# Altium PCB CAN Logger 3e HP3651 PCB.PcbDoc (part 3 of 3)
Units mm, origin at the board's own origin, x right, y up, seen from the top; angles counter-clockwise.
Board outline 56.62 x 82.65 mm, 4 copper layers (Component Side, Signal Layer 2, Signal Layer 1, Solder Side), stack 0.844 mm thick; 116 components, 130 nets, 582 pads, 374 vias.
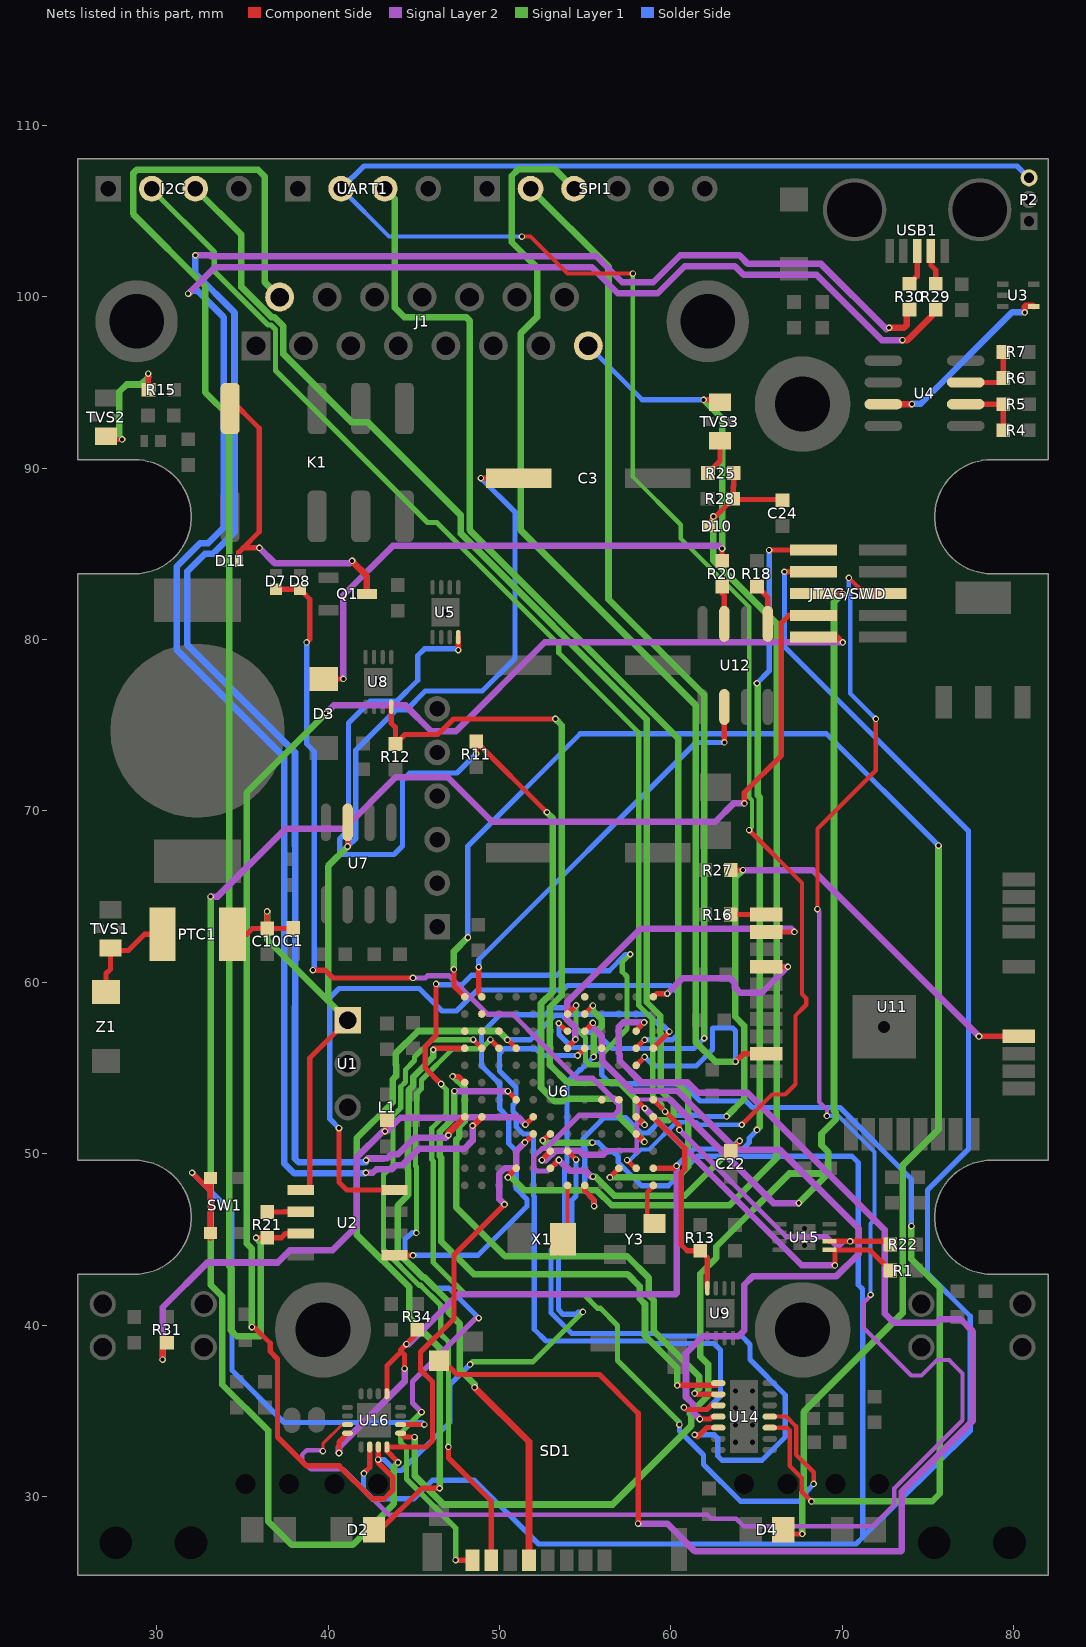
[diagram p5: the nets of this part, all layers, seen from the top]

## Via types
v1: diameter 0.381, hole 0.229, Component Side to Solder Side, 292 vias
v2: diameter 0.508, hole 0.254, Component Side to Solder Side, 66 vias
v3: diameter 0.508, hole 0.33, Component Side to Solder Side, 12 vias
v4: diameter 1.27, hole 0.711, Component Side to Solder Side, 4 vias

## Nets (pads, with @x,y where several pads share a name; then routed paths per layer and width w, separated by ;. In a path a pad name is that pad's centre, name@x,y a point inside that pad or via, vN(x,y) a via of type N, cw(c..) or ccw(c..) an arc to the next point about the centre after c; other vN are vias at no path point) (continued)
NetD11_1: D11.1 K1.8 Q1.3 | length 20.2
  Component Side w0.305: K1.8@34.29,93.472 34.29,94.02 35.992,92.318 35.992,86.284 35.052,85.344 ; D11.1@34.798,84.582 34.798,85.09 35.052,85.344 ; v1(35.992,85.344) 35.052,85.344
  Component Side w0.381: v1(41.402,84.582) 41.402,84.568 42.273,83.697 Q1.3@42.273,82.654
  Signal Layer 2 w0.381: v1(35.992,85.344) 36.881,84.455 41.275,84.455 v1(41.402,84.582)
NetJTAG/SWD_5: JTAG/SWD.5 U16.3 | length 107.8
  Component Side w0.178: v1(39.7,32.645) 39.7,33.073 40.82,34.193 U16.3@41.134,34.193
  Component Side w0.254: v1(68.555,64.262) 68.555,68.954 71.958,72.358 v1(71.958,75.362) ; v1(70.383,83.591) 70.397,83.591 71.311,82.677 JTAG/SWD.5@72.366,82.677
  Signal Layer 2 w0.254: v1(39.7,32.645) 39.643,32.703 38.754,32.703 38.494,32.442 38.494,32.074 38.983,31.585 40.89,31.585 43.544,28.931 62.14,28.931 62.369,28.702 63.819,28.702 64.264,28.258 71.755,28.258 73.038,29.54 73.038,30.474 77.016,34.452 77.016,37.178 76.233,37.961 75.528,37.961 74.625,37.059 74.028,37.059 71.26,39.827 71.26,41.316 71.65,41.706 v1(71.65,41.77) ; v1(68.555,64.262) 68.664,64.152 68.664,53.019 69.11,52.574 v1(69.11,52.204)
  Solder Side w0.254: v1(69.11,52.204) 69.775,52.204 71.884,50.095 71.884,46.15 71.65,45.916 v1(71.65,41.77) ; v1(70.383,83.591) 70.383,82.95 70.472,82.861 70.472,76.848 v1(71.958,75.362)
NetPTC1_1: PTC1.1 TVS1.2 Z1.2 | length 6
  Component Side w0.305: Z1.2@27.051,59.436 27.051,60.503 27.305,60.757 27.305,61.849 28.346,61.849 29.299,62.801 PTC1.1@30.353,62.801
NetR4_2: R4.2 R5.1 U4.6 | length 3.7
  Component Side w0.305: U4.6@77.203,93.726 R5.1@79.399,93.726 79.399,92.951 79.387,92.939 R4.2@79.387,92.202
NetR6_1: R6.1 R7.1 U4.7 | length 3.8
  Component Side w0.305: U4.7@77.203,94.996 79.133,94.996 R6.1@79.387,95.25 R7.1@79.387,96.774
NetR15_1: R15.1 TVS2.2 | length 6.8
  Component Side w0.305: TVS2.2@27.051,91.694 27.076,91.669 v1(27.991,91.669) ; v1(29.513,95.504) 29.513,94.578 R15.1@29.527,94.564
  Signal Layer 1 w0.381: v1(27.991,91.669) 27.826,91.834 27.826,94.444 28.254,94.873 29.087,94.873 29.515,95.301
NetR16_1: R16.1 U11.10 | length 2.1
  Component Side w0.305: R16.1@63.488,63.952 U11.10@65.558,63.952
NetR18_2: R18.2 U12.1 | length 2.4
  Component Side w0.305: R18.2@65.024,83.083 65.659,82.448 U12.1@65.659,80.911
NetR20_2: R20.2 U12.3 | length 2.2
  Component Side w0.305: R20.2@62.992,83.083 62.992,82.672 63.119,82.545 U12.3@63.119,80.911
NetR21_1: R21.1 U2.6 | length 2
  Component Side w0.305: R21.1@36.449,46.597 37.414,46.597 37.426,46.609 U2.6@38.408,46.609
NetR25_1: R25.1 TVS3.2 | length 2
  Component Side w0.305: R25.1@62.168,89.709 62.865,90.406 TVS3.2@62.865,91.44
NetR29_2: R29.2 USB1.2 | length 2
  Component Side w0.305: USB1.2@75.171,102.667 75.171,101.83 75.452,101.549 R29.2@75.452,100.751
NetR30_2: R30.2 USB1.3 | length 2.1
  Component Side w0.305: R30.2@73.928,100.751 74.371,101.194 USB1.3@74.371,102.667
NetSD1_5: SD1.5 U6.D1 | length 35.8
  Component Side w0.305: v1(46.139,56.065) 46.16,56.065 46.244,56.149 U6.D1@47.975,56.149
  Component Side w0.381: v1(48.55,36.364) 51.726,33.188 SD1.5@51.726,26.284
  Signal Layer 1 w0.381: v1(46.139,56.065) 46.139,55.649 44.983,54.494 44.983,53.981 44.712,53.709 44.712,52.134 44.64,52.063 44.64,49.085 44.688,49.038 44.688,47.592 44.069,46.974 44.069,44.24 45.51,42.798 45.6,42.798 47.041,41.357 47.041,40.724 47.676,40.089 47.676,37.421 48.55,36.548 v1(48.55,36.364)
NetSD1_7: SD1.7 U6.D2 | length 37.3
  Component Side w0.305: v1(47.028,32.893) 47.028,32.239 49.526,29.741 SD1.7@49.526,26.284 ; v1(48.475,56.649) U6.D2@48.975,56.149
  Signal Layer 1 w0.305: v1(47.028,32.893) 47.028,39.027 46.571,39.484 46.571,41.162 45.405,42.328 45.316,42.328 43.243,44.401 43.243,48.785 43.787,49.329 43.787,52.211 44.242,52.665 44.242,53.904 44.514,54.176 44.514,54.896 45.048,55.43 45.048,55.638 46.059,56.649 v1(48.475,56.649)
NetSD1_8: SD1.8 U6.D3 | length 41.4
  Component Side w0.305: v1(47.447,26.289) 47.513,26.289 47.518,26.284 SD1.8@48.426,26.284 ; v1(49.475,56.649) U6.D3@49.975,56.149
  Signal Layer 2 w0.305: v1(45.453,34.925) 44.931,35.447 44.931,36.498 44.934,36.502 44.934,36.705 48.638,40.409 v1(48.793,40.409) v1@48.808,40.423
  Signal Layer 1 w0.305: v1(45.161,45.375) 45.158,45.379 45.158,49.233 45.11,49.28 45.11,51.868 45.182,51.939 45.182,53.515 45.453,53.786 45.453,54.299 47.275,56.121 48.947,56.121 v1(49.475,56.649) ; v1(45.453,34.925) 44.242,33.714 44.242,33.163 44.577,32.828 44.577,31.027 47.447,28.157 v1(47.447,26.289)
  Solder Side w0.305: 44.894,45.39 44.69,45.187 44.667,45.187 44.488,45.008 44.488,43.874 46.214,42.149 47.053,42.149 v1(48.793,40.409) ; 44.894,45.39 45.147,45.39 v1(45.161,45.375)
NetU3_4: U3.4 U4.3 | length 11.3
  Component Side w0.381: U4.3@72.403,93.726 v1(74.066,93.726) ; v1(80.645,99.085) 80.645,99.411 80.698,99.464 81.126,99.464 U3.4@81.164,99.426
  Solder Side w0.381: v1(74.066,93.726) 74.092,93.751 74.574,93.751 79.908,99.085 v1(80.645,99.085)
NetU6_A8: U6.A8
NetU6_B2: U6.B2
NetU6_B7: U6.B7 U14.4 | length 77.8
  Component Side w0.254: U14.4@65.77,34.663 66.735,34.663 67.31,34.088 67.31,32.434 68.333,31.41 v1(68.333,30.734)
  Component Side w0.305: v1(46.304,59.906) 46.304,56.895 45.669,56.26 45.669,54.996 v1(46.601,54.064) ; U6.B7@53.975,58.149 v1(54.475,58.649)
  Signal Layer 1 w0.305: v1(46.601,54.064) 46.601,54.043 46.901,53.743 46.901,52.33 46.05,51.479 46.05,49.669 46.139,49.58 46.139,43.651 47.986,41.804 54.898,41.804 55.723,40.979 55.889,40.979 56.89,39.978 56.89,37.939 60.503,34.327 v1(60.503,34.188) ; v1(54.475,58.649) 54.475,57.33 55.029,56.776 55.029,55.406 55.254,55.181 55.778,55.181 55.994,55.398 55.994,55.821 57.442,57.268 57.442,60.335 57.164,60.613 57.164,61.166 v1(57.634,61.636)
  Solder Side w0.305: v1(46.304,59.906) 46.355,59.855 47.809,59.855 48.367,60.413 53.353,60.413 53.608,60.668 56.408,60.668 57.362,61.621 57.619,61.621 v1(57.634,61.636) ; v1(60.503,34.188) 60.503,33.829 61.912,32.419 61.912,31.862 64.057,29.718 67.462,29.718 67.888,30.143 67.888,30.268 68.333,30.713 v1(68.333,30.734)
NetU6_C1: U6.C1
NetU6_C2: U6.C2
NetU6_C3: U6.C3
NetU6_C7: U6.C7 U14.3 | length 58.8
  Component Side w0.254: U14.3@65.77,34.013 66.78,34.013 66.929,33.864 66.929,31.792 67.64,31.081 67.64,30.277 v1(68.199,29.718)
  Component Side w0.305: v1@53.461,57.607 U6.C7@53.947,57.121 ; U6.C7@53.947,57.135 U6.C7@53.947,57.121 ; U6.C7@53.975,57.149 U6.C7@53.947,57.121
  Signal Layer 1 w0.381: v1(68.199,29.718) 75.248,29.718 75.692,30.162 75.692,42.189 74.028,43.853 v1(74.028,45.771)
  Solder Side w0.305: v1(53.46,57.607) 53.475,57.593 53.475,56.96 54.238,56.197 55.617,56.197 55.969,55.846 55.969,54.597 56.49,54.077 60.706,54.077 61.709,53.073 64.376,53.073 64.757,52.692 69.861,52.692 74.028,48.525 v1(74.028,45.771)
NetU6_D7: U6.D7 U11.11 | length 19.8
  Component Side w0.305: U6.D7@53.975,56.149 53.975,56.188 54.418,56.631 54.418,56.653 v1(54.432,56.667) ; U11.11@65.558,62.936 67.202,62.936 v1(67.204,62.937)
  Signal Layer 2 w0.381: v1(54.432,56.667) 54.432,57.353 53.967,57.819 53.967,58.859 58.227,63.119 67.022,63.119 v1(67.204,62.937)
NetU6_D9: U6.D9
NetU6_G9: U6.G9
NetU6_G10: U6.G10
nINT0: U6.F1 U14.9 | length 31.5
  Component Side w0.305: v1(47.269,54.508) 47.616,54.508 U6.F1@47.975,54.149 ; v1(61.392,36.017) 61.446,35.963 U14.9@62.77,35.963
  Signal Layer 1 w0.381: v1(47.269,54.508) 47.327,54.508 47.981,53.855 47.981,51.902 47.65,51.571 47.65,50.977 47.473,50.8 47.473,46.874 50.328,44.018 57.455,44.018 58.699,42.774 58.699,41.746 59.001,41.444 59.001,39.652 61.671,36.982 61.671,36.297 v1(61.392,36.017)
nINT1: U6.G4 U14.8 | length 34.7
  Component Side w0.305: v1(50.495,53.645) U6.G4@50.956,53.184 ; v1(60.376,36.487) 61.586,36.487 ; 61.587,36.487 62.644,36.487 U14.8@62.77,36.613
  Signal Layer 2 w0.381: v1(47.371,53.645) v1(50.495,53.645)
  Signal Layer 1 w0.381: v1(47.371,53.645) 47.371,52.135 46.52,51.284 46.52,49.864 46.609,49.775 46.609,44.875 48.507,42.977 57.468,42.977 58.191,42.253 58.191,41.535 58.493,41.234 58.493,39.373 60.376,37.491 v1(60.376,36.487)
OSC16: U6.M12 Y3.3 | length 3.4
  Component Side w0.254: Y3.3@58.894,45.962 58.99,45.866 58.623,45.499 58.623,47.744 58.975,48.096 U6.M12@58.975,48.149
Program: SW1.1 SW1.2 U16.10 | length 32.3
  Component Side w0.305: v1(32.067,48.885) 33.147,47.806 33.147,46.66 ; SW1.1@33.147,45.06 33.147,46.66 ; SW1.2@33.147,48.26 33.147,46.66 ; U16.10@44.234,34.193 v1(45.618,34.193)
  Solder Side w0.305: v1(32.067,48.885) 34.392,46.561 34.392,37.363 37.44,34.315 45.496,34.315 v1(45.618,34.193)
PTA0: JTAG/SWD.4 U6.J5 U16.8 | length 123.8
  Component Side w0.305: v1(44.094,31.985) 43.434,32.645 U16.8@43.434,32.893 45.733,32.893 46.088,33.249 46.088,36.697 45.401,37.385 45.401,38.427 47.346,40.371 47.346,44.095 v1(50.295,47.045) ; v1(51.486,50.66) U6.J5@51.975,51.149 ; v1(64.287,70.434) 64.287,71.069 66.446,73.228 66.446,80.962 66.891,81.407 JTAG/SWD.4@68.326,81.407
  Signal Layer 2 w0.381: v1(33.147,64.999) 33.553,64.999 37.516,68.961 40.945,68.961 43.942,71.958 46.99,71.958 49.581,69.367 62.586,69.367 63.652,70.434 v1(64.287,70.434) ; v1(50.295,47.045) 49.987,47.353 49.987,48.826 50.31,49.149 50.952,49.149 50.978,49.174 50.978,50.152 v1(51.486,50.66)
  Signal Layer 1 w0.381: v1(33.147,64.999) 33.147,42.357 33.833,41.671 33.833,36.525 36.5,33.858 36.5,28.55 37.871,27.178 41.453,27.178 43.84,29.566 43.84,31.731 v1(44.094,31.985)
PTA1: JTAG/SWD.8 U6.J6 U16.6 | length 144.6
  Component Side w0.305: v1(42.088,31.344) 42.088,31.362 42.434,31.709 U16.6@42.434,32.893 ; v1(52.527,50.775) 52.542,50.789 52.576,50.789 52.936,51.149 U6.J6@52.975,51.149 ; v1(66.624,83.947) JTAG/SWD.8@68.326,83.947
  Signal Layer 1 w0.381: v1(52.527,50.775) 52.654,50.648 v1(55.423,50.648)
  Solder Side w0.305: 42.227,31.499 42.062,31.334 42.062,30.376 42.568,29.87 45.02,29.87 46.1,30.95 48.552,30.95 52.273,27.229 70.802,27.229 71.198,27.62 77.47,33.82 77.47,40.513 74.981,43.002 74.981,47.879 77.368,50.266 77.368,68.834 66.624,79.578 v1(66.624,83.947) ; v1(55.423,50.648) 55.766,50.648 56.312,50.102 56.659,50.102 56.934,49.826 56.934,49.48 58.281,48.133 59.852,48.133 61.567,49.847 70.56,49.847 70.933,49.475 70.933,42.356 71.18,42.109 71.18,41.194 71.196,41.177 71.196,27.622
PTA2: JTAG/SWD.6 U6.K6 U16.9 | length 102.2
  Component Side w0.305: U16.9@44.234,33.693 44.46,33.467 v1(45.047,33.467) ; v1(52.476,49.622) 52.476,49.65 U6.K6@52.975,50.149 ; JTAG/SWD.6@68.326,82.677 v1(70.028,82.677)
  Signal Layer 2 w0.254: 56.282,50.199 56.289,50.206 57.91,50.206 57.997,50.292 ; 58.004,50.082 58.005,50.205 58.036,53.087 57.975,53.149 59.944,53.162
  Signal Layer 2 w0.381: v1(52.476,49.622) 52.704,49.622 53.239,50.157 54.274,50.157 54.685,50.157 54.903,49.939 56.047,49.939 56.265,50.157 ; 59.944,53.162 65.989,47.117 v1(67.462,47.117)
  Signal Layer 1 w0.381: v1(45.047,33.467) 45.047,31.222 46.735,29.534 56.603,29.534 61.183,34.114 61.183,34.732 61.098,34.816 62.179,35.897 62.179,37.706 61.722,38.163 61.722,42.994 62.644,43.917 62.644,44.571 66.917,48.844 69.19,48.844 ; v1(67.462,47.117) 69.19,48.844 ; v1(70.028,82.677) 69.52,82.169 69.52,52.512 69.618,52.415 69.618,51.994 68.789,51.166 68.789,50.494 69.19,50.094 69.19,48.844
PTA3: JTAG/SWD.2 U6.K7 U16.7 | length 120
  Component Side w0.305: v1(35.56,39.878) 35.687,39.878 36.627,38.938 36.627,38.453 37.059,38.02 37.059,33.472 38.744,31.788 40.651,31.788 42.568,29.87 43.284,29.87 43.79,30.376 43.79,31.115 42.926,31.979 v1(42.926,32.156) ; v1@42.934,32.118 U16.7@42.934,32.893 ; U6.K7@53.975,50.149 v1(54.475,49.649) ; JTAG/SWD.2@68.326,80.137 69.723,80.137 v1(70.028,79.832)
  Signal Layer 2 w0.381: v1(39.878,75.692) 40.335,76.149 44.526,76.149 46.025,74.651 47.46,74.651 52.642,79.832 v1(70.028,79.832)
  Signal Layer 1 w0.305: v1(48.285,37.706) 48.438,37.859 51.956,37.859 v1(54.864,40.767)
  Signal Layer 1 w0.381: v1(35.56,39.878) 35.56,44.45 35.255,44.755 35.255,71.069 v1(39.878,75.692)
  Solder Side w0.305: v1(42.926,32.156) 43.258,32.156 43.9,31.515 44.289,31.515 47.11,34.336 47.11,36.531 v1(48.285,37.706) ; v1(54.475,49.649) 54.475,47.536 54.225,47.286 54.225,44.979 53.442,44.195 53.442,40.903 53.717,40.627 54.47,40.627 54.595,40.752 54.849,40.752 v1(54.864,40.767)
RAW: D3.1 J1.8 R20.1 TVS3.1 | length 48.2
  Component Side w0.305: D3.1@39.751,77.699 v1(40.894,77.699) ; v1(61.912,93.98) TVS3.1@62.865,93.98 ; R20.1@62.992,84.583 v1(62.992,85.3)
  Signal Layer 2 w0.381: v1(40.894,77.699) 40.894,82.575 43.79,85.471 62.821,85.471 v1(62.992,85.3)
  Signal Layer 1 w0.381: v1(61.912,93.98) 62.992,92.9 v1(62.992,85.3)
  Solder Side w0.305: J1.8@55.184,97.132 58.336,93.98 v1(61.912,93.98)
RAW_Measured: C24.2 D10.2 R25.2 R28.1 U6.L4 | length 64.2
  Component Side w0.305: v1@50.553,48.727 U6.L4@50.975,49.149 ; D10.2@62.218,86.614 62.406,86.97 62.914,87.478 ; v1(62.484,87.173) 62.609,87.173 62.914,87.478 ; R25.2@63.668,89.709 63.668,88.955 63.638,88.925 R28.1@63.638,88.202 ; C24.2@66.517,88.114 66.473,88.158 63.683,88.158 R28.1@63.638,88.202 ; 62.914,87.478 R28.1@63.638,88.202
  Signal Layer 1 w0.381: v1(50.495,48.616) 50.698,48.616 51.46,47.854 55.684,47.854 56.548,46.99 63.424,46.99 66.167,49.733 66.167,80.924 62.484,84.607 v1(62.484,87.173)
RAW_Sense: U6.A2 U12.6 | length 23.9
  Component Side w0.305: v1(48.793,60.883) 48.793,59.331 U6.A2@48.975,59.149 ; v1(63.119,73.99) U12.6@63.119,76.061
  Solder Side w0.305: v1(48.793,60.883) 48.793,61.316 61.468,73.99 v1(63.119,73.99)
RED: D2.1 SPI1.2 U6.D4 | length 108
  Component Side w0.305: D2.1@42.682,28.067 43.066,28.067 45.479,30.48 v1(46.507,30.48) ; v1(50.47,56.642) 50.482,56.642 U6.D4@50.975,56.149
  Signal Layer 1 w0.381: v1(46.507,30.48) 46.507,38.666 44.735,40.438 44.735,42.217 41.669,45.283 41.669,50.901 43.772,53.004 43.772,54.331 43.968,54.527 43.968,55.169 43.942,55.195 43.942,55.836 45.263,57.157 49.955,57.157 v1(50.47,56.642) ; SPI1.2@51.816,106.299 56.363,101.752 56.363,82.347 61.951,76.759 v1(61.951,56.733)
  Solder Side w0.305: v1(50.47,56.642) 51.812,56.642 53.247,58.077 53.655,58.077 54.152,57.58 54.185,57.58 54.682,57.082 55.63,57.082 56.578,56.134 61.352,56.134 v1(61.951,56.733)
RESET_B: JTAG/SWD.10 R34.2 U6.L12 U16.4 U16.13 | length 81.9
  Component Side w0.305: v1(40.64,32.537) 40.64,33.185 41.148,33.693 U16.4@41.134,33.693 ; U16.13@43.434,35.993 43.434,37.625 44.227,38.417 44.227,38.505 44.465,38.267 v1(44.465,37.465) ; 44.227,38.537 v1(44.577,38.887) 44.577,38.908 45.206,39.537 R34.2@45.206,39.726 ; U6.L12@58.975,49.149 60.204,49.149 v1(60.34,49.285) ; v1(65.735,85.217) JTAG/SWD.10@68.326,85.217
  Signal Layer 2 w0.381: v1(40.64,32.537) 40.64,32.88 44.465,36.705 v1(44.465,37.465) ; v1(44.577,38.887) 44.698,38.887 47.607,41.796 60.274,41.796 60.34,41.862 v1(60.34,49.285)
  Signal Layer 1 w0.381: v1(65.024,51.384) 65.176,51.537 65.176,70.802 65.077,70.902 65.077,77.392 v1(65.024,77.445)
  Solder Side w0.305: v1(60.34,49.285) 61.334,50.279 64.203,50.279 64.578,50.655 64.578,50.918 65.024,51.364 v1(65.024,51.384) ; v1(65.024,77.445) 65.735,78.156 v1(65.735,85.217)
RX1: P2.3 U6.L11 UART1.2 | length 124.4
  Component Side w0.254: v1(51.308,103.505) 51.816,103.505 53.975,101.346 v1(57.785,101.346) ; v1(57.455,49.624) 57.455,49.616 57.922,49.149 U6.L11@57.975,49.149 ; v1(64.135,51.689) 65.901,53.455 66.679,53.455 67.272,54.048 67.272,58.054 67.903,58.685 67.903,59.053 67.648,59.308 67.648,65.793 v1(64.569,68.872)
  Signal Layer 1 w0.254: v1(57.785,101.346) 57.785,89.484 60.579,86.69 60.579,85.884 64.569,81.894 64.569,70.781 64.732,70.618 64.732,69.035 v1(64.569,68.872)
  Solder Side w0.254: UART1.2@40.767,106.299 43.561,103.505 v1(51.308,103.505) ; v1(57.455,49.624) 57.625,49.624 58.242,50.241 58.731,50.241 60.319,51.829 61.491,51.829 61.631,51.689 v1(64.135,51.689)
  Solder Side w0.305: UART1.2@40.767,106.299 42.096,107.628 80.205,107.628 P2.3@80.899,106.934
"Safe 12V": C1.2 C3.1 C10.1 PTC1.2 U1.1 U2.5 U7.7 | length 66.1
  Component Side w0.305: PTC1.2@34.417,62.801 35.255,62.801 35.584,63.13 C10.1@36.449,63.13 ; v1(36.449,64.135) C10.1@36.449,63.13 ; C1.2@37.973,63.16 37.944,63.13 C10.1@36.449,63.13 ; U2.5@38.408,47.879 38.938,47.879 38.938,55.575 U1.1@41.148,57.785 ; v1(41.148,67.92) U7.7@41.148,69.329 ; v1(48.92,89.408) C3.1@51.134,89.408
  Signal Layer 1 w0.381: v1(36.449,64.135) 36.449,62.484 40.005,58.928 ; U1.1@41.148,57.785 40.005,58.928 ; v1(41.148,67.92) 40.005,66.777 40.005,58.928
  Solder Side w0.305: v1(41.148,67.92) 41.624,68.396 41.624,73.548 43.966,75.89 44.571,75.89 45.669,76.987 48.997,76.987 50.902,78.892 50.902,87.427 v1(48.92,89.408)
SCK: U6.D8 U14.10 | length 41.5
  Component Side w0.305: v1(54.559,55.728) 54.559,55.73 54.975,56.146 U6.D8@54.975,56.149 ; v1(60.766,35.203) 60.895,35.073 62.099,35.073 62.339,35.313 U14.10@62.77,35.313
  Solder Side w0.305: v1(54.559,55.728) 52.502,55.728 52.105,56.124 50.275,56.124 50,55.849 50,54.826 50.965,53.861 50.965,53.027 50.787,52.849 50.787,52.46 50.978,52.269 50.978,51.571 51.393,51.156 51.962,51.156 51.987,51.13 51.987,47.551 52.036,47.503 52.036,39.756 52.714,39.078 58.847,39.078 58.999,38.925 62.511,38.925 62.89,38.546 62.89,35.865 62.099,35.073 60.895,35.073 v1(60.766,35.203)
SCK1: SPI1.3 U6.E11 U11.18 | length 74.5
  Component Side w0.305: U6.E11@57.975,55.149 v1(58.474,55.648) ; v1(63.779,55.372) 64.231,55.824 U11.18@65.558,55.824
  Signal Layer 1 w0.381: SPI1.3@54.356,106.299 53.213,107.442 51.117,107.442 50.724,107.048 50.724,103.175 52.197,101.702 52.197,98.806 51.232,97.841 51.232,86.38 61.443,76.169 61.443,56.515 62.586,55.372 v1(63.779,55.372)
  Solder Side w0.305: v1(58.474,55.648) 59.004,55.118 61.481,55.118 62.433,56.07 62.433,57.302 62.459,57.328 63.614,57.328 63.779,57.163 v1(63.779,55.372)
SCL0: I2C.2 R22.2 U6.G12 U15.6 | length 85.5
  Component Side w0.305: U6.G12@58.975,53.149 60.488,51.636 60.488,51.399 v1(60.503,51.384) ; U15.6@69.247,44.886 v1(70.463,44.886) 72.627,44.886 R22.2@72.808,44.704
  Signal Layer 2 w0.305: v1(60.503,51.384) 66.731,45.156 69.106,45.156 69.609,44.653 69.861,44.653 70.079,44.871 70.448,44.871 v1(70.463,44.886)
  Signal Layer 1 w0.305: I2C.2@29.718,106.299 29.718,106.248 33.368,102.598 33.368,101.475 36.503,98.34 36.671,98.34 36.932,98.079 36.932,95.682 45.797,86.816 46.341,86.816 53.46,79.697 53.46,79.223 58.128,74.555 58.128,58.64 58.915,57.853 58.915,56.859 58.941,56.834 58.941,55.846 58.944,55.843 58.944,53.375 59.475,52.844 59.475,52.662 59.665,52.472 v1(59.665,52.451)
"SD Contact": SD1.DT U6.C11 | length 84.3
  Component Side w0.305: SD1.DT@46.486,37.914 46.913,37.486 47.158,37.486 47.522,37.122 55.832,37.122 58.094,34.861 v1(58.094,28.423) ; U6.C11@57.975,57.149 57.975,57.188 v1(58.445,57.658)
  Signal Layer 2 w0.381: v1(58.094,28.423) 59.792,28.423 61.417,26.797 73.406,26.797 73.482,26.873 73.482,30.29 77.622,34.43 77.622,39.624 76.911,40.335 75.692,40.335 75.489,40.132 73.025,40.132 72.485,40.672 72.485,45.549 64.491,53.543 61.595,53.543 60.96,54.178 60.579,54.178 58.26,54.178 57.023,55.416 57.023,55.811 56.972,55.862 56.972,57.404 57.226,57.658 v1(58.445,57.658)
SDA0: I2C.3 R1.2 U6.G11 U15.5 | length 88.6
  Component Side w0.305: U6.G11@57.975,53.149 57.977,53.149 58.475,52.651 v1(58.478,52.651) ; v1(69.571,43.485) 69.571,44.386 71.603,44.386 R1.2@72.808,43.18
  Signal Layer 2 w0.381: v1(58.478,52.651) 58.478,52.646 67.639,43.485 v1(69.571,43.485)
  Signal Layer 1 w0.381: I2C.3@32.258,106.299 34.95,103.607 34.95,100.557 36.697,98.81 36.866,98.81 37.402,98.274 37.402,96.65 41.393,92.659 42.331,92.659 47.752,87.238 47.752,86.178 58.598,75.332 58.598,58.835 59.385,58.047 59.385,57.054 59.411,57.028 59.411,56.914 59.414,56.911 59.414,53.674 60.173,52.915 60.173,52.241 59.875,51.943 59.183,51.943 v1@58.476,52.65
SDI: U6.C8 U14.11 | length 43
  Component Side w0.305: U6.C8@54.975,57.149 v1@55.451,57.626 ; v1(61.697,34.519) 62.289,34.519 62.433,34.663 U14.11@62.77,34.663
  Signal Layer 2 w0.381: v1(55.451,57.627) 55.451,57.382 55.956,56.877 55.956,55.913 56.007,55.862 56.007,55.39 57.727,53.67 60.369,53.67 63.798,50.241 66.345,50.241 70.971,45.615 70.971,44.166 69.641,42.837 64.77,42.837 64.287,42.355 64.287,39.688 63.944,39.345 61.874,39.345 60.884,38.354 60.884,35.803 61.308,35.379 61.308,34.907 v1(61.697,34.519)
SDO: U6.B8 U14.12 | length 47.4
  Component Side w0.305: U6.B8@54.975,58.149 54.975,58.16 v1(55.448,58.633) ; v1(61.392,33.604) 61.426,33.604 61.563,33.467 62.117,34.022 62.761,34.022 U14.12@62.77,34.013
  Signal Layer 1 w0.381: v1(55.448,58.633) 55.448,58.348 55.959,57.837 55.959,57.417 55.499,56.957 v1(55.499,55.651)
  Solder Side w0.305: v1(55.499,55.651) 54.742,54.895 54.692,54.895 53.95,54.153 53.95,49.45 53.793,49.294 53.793,45.157 53.01,44.374 53.01,40.724 54.224,39.51 59.103,39.51 59.256,39.357 64.135,39.357 64.618,38.875 64.618,37.984 66.675,35.927 66.675,33.467 65.326,32.118 62.981,32.118 62.735,32.364 62.735,33.404 62.672,33.467 62.535,33.604 v1(61.392,33.604)
"Silent 0": R11.1 U5.8 U6.J11 | length 62
  Component Side w0.305: v1(47.6,79.375) 47.601,79.376 U5.8@47.601,80.137 ; v1(48.641,73.33) R11.1@48.641,74.041 v1(52.764,69.918) ; U6.J11@57.975,51.149 57.993,51.149 v1(58.457,50.685)
  Signal Layer 1 w0.381: v1(52.764,69.918) 53.124,69.558 53.124,59.453 52.426,58.755 52.426,53.855 53.234,53.046 53.655,53.046 53.822,53.213 56.685,53.213 56.983,52.915 56.983,52.159 v1(58.457,50.685)
  Solder Side w0.305: v1(47.6,79.375) 47.523,79.451 45.631,79.451 45.237,79.057 45.237,77.622 44.018,76.403 42.469,76.403 41.192,75.127 41.192,68.866 40.678,68.351 40.678,67.488 40.716,67.45 43.853,67.45 44.348,67.945 44.348,71.793 44.767,72.212 47.523,72.212 v1(48.641,73.33)
"Silent 1": R12.1 U6.H11 U8.8 | length 41.1
  Component Side w0.305: U8.8@43.688,76.073 43.688,75.108 43.942,74.854 R12.1@43.942,73.902 44.487,74.447 46.406,74.447 47.32,75.362 v1(53.264,75.362) ; U6.H11@57.975,52.149 U6.H11@57.987,52.161 ; U6.H11@58.03,52.204 U6.H11@57.987,52.161 ; v1(58.467,51.681) U6.H11@57.987,52.161
  Signal Layer 1 w0.381: v1(53.264,75.362) 53.632,74.993 53.632,59.243 52.934,58.544 52.934,55.191 53.972,54.153 56.984,54.153 57.968,53.169 57.968,52.18 v1(58.467,51.681)
"Silent 2": R13.1 U6.H12 U9.8 | length 11.9
  Component Side w0.305: U6.H12@58.975,52.149 60.81,50.314 60.81,49.091 60.604,48.885 60.604,44.691 60.96,44.335 R13.1@61.722,44.335 62.127,43.93 U9.8@62.127,42.143
SWCAN: J1.9 R21.2 U2.7 | length 95.7
  Component Side w0.305: U2.7@38.408,45.339 37.529,45.339 37.287,45.097 R21.2@36.449,45.097 v1@35.827,45.097 ; v1@35.827,45.097 35.809,45.078 35.79,45.097 v1(35.809,45.097) v1@35.827,45.097
  Signal Layer 1 w0.381: v1(35.809,45.097) 35.809,45.078 36.068,44.819 36.068,39.372 36.043,39.346 34.682,39.346 34.341,39.688 34.341,43.332 34.239,43.434 34.239,93.015 32.842,94.412 32.842,100.609 28.626,104.826 28.626,107.188 28.829,107.391 35.928,107.391 36.322,106.998 36.322,100.829 J1.9@37.179,99.972
SWCANRX: U2.4 U6.D11 | length 41.5
  Component Side w0.305: v1(40.64,51.486) 40.64,48.336 41.097,47.879 U2.4@43.888,47.879 ; U6.D11@57.975,56.149 v1(58.468,56.642)
  Solder Side w0.305: v1(40.64,51.486) 40.107,52.019 40.107,59.106 40.64,59.639 45.326,59.639 46.647,58.318 47.494,58.318 48.725,59.549 53.71,59.549 53.965,59.804 59.986,59.804 60.389,59.402 60.389,56.93 60.101,56.642 v1(58.468,56.642)
SWCANTX: U2.1 U6.D12 | length 33.6
  Component Side w0.305: U2.1@43.888,44.069 v1(44.958,44.069) ; U6.D12@58.975,56.149 58.975,56.165 59.919,57.109 v1(59.919,57.125)
  Solder Side w0.305: v1(44.958,44.069) 48.738,44.069 51.604,46.935 51.604,47.324 50.978,47.95 50.978,50.165 50.546,50.597 50.546,52.09 50.025,52.611 50.025,54.064 48.959,55.131 48.959,57.029 50.032,58.102 52.662,58.102 53.068,58.509 53.833,58.509 54.214,58.128 58.687,58.128 59.372,57.442 59.58,57.442 59.898,57.125 v1(59.919,57.125)
TX1: U6.L10 UART1.3 | length 72.1
  Component Side w0.305: v1(56.439,48.613) U6.L10@56.975,49.149
  Signal Layer 1 w0.381: UART1.3@43.307,106.299 43.891,105.715 43.891,99.365 44.45,98.806 48.057,98.806 48.26,98.603 48.26,86.388 60.427,74.221 60.427,54.051 61.011,53.467 61.011,49.238 60.386,48.613 v1(56.439,48.613)
"USB D_N": R29.1 U6.H2 | length 118
  Component Side w0.381: v1(48.436,51.628) 48.473,51.628 48.975,52.13 U6.H2@48.975,52.149 ; v1(73.508,97.46) 73.801,97.46 75.452,99.11 R29.1@75.452,99.251
  Signal Layer 2 w0.381: v1(31.839,100.178) 31.877,100.178 33.426,101.727 55.384,101.727 56.908,100.203 59.238,100.203 60.813,101.778 63.738,101.778 64.246,101.27 68.504,101.27 72.314,97.46 v1(73.508,97.46) ; v1(42.21,48.885) 42.616,48.885 42.814,49.083 43.488,49.083 43.503,49.098 43.732,49.098 43.969,49.336 44.35,49.336 45.306,50.292 47.965,50.292 48.436,50.763 v1(48.436,51.628)
  Solder Side w0.381: v1(31.839,100.178) 31.877,100.178 32.051,100.352 32.367,100.352 33.909,98.81 33.909,86.512 33.018,85.621 32.544,85.621 31.166,84.243 31.166,79.417 37.44,73.143 37.44,68.409 37.452,68.397 37.452,58.836 37.44,58.823 37.44,49.44 38.035,48.845 42.169,48.845 v1(42.21,48.885)
"USB D_P": R30.1 U6.H1 | length 114.6
  Component Side w0.381: v1(47.028,51.074) 47.028,51.202 U6.H1@47.975,52.149 ; v1(72.733,98.183) 73.596,98.183 73.731,98.318 73.762,98.318 73.762,99.085 R30.1@73.928,99.251
  Signal Layer 2 w0.381: v1(32.258,102.413) 33.113,102.413 33.163,102.362 55.647,102.362 57.171,100.838 58.975,100.838 60.55,102.413 64.001,102.413 64.509,101.905 68.767,101.905 72.577,98.095 72.665,98.183 v1(72.733,98.183) ; v1(42.227,49.616) 42.329,49.718 43.225,49.718 43.24,49.733 43.469,49.733 43.706,49.971 44.087,49.971 45.043,50.927 46.881,50.927 v1(47.028,51.074)
  Solder Side w0.381: v1(32.258,102.413) 32.258,101.359 34.544,99.073 34.544,86.249 33.281,84.986 32.807,84.986 31.801,83.98 31.801,79.68 38.075,73.406 38.075,67.958 ; 38.087,68.073 38.087,58.573 38.075,58.56 38.075,49.703 38.282,49.496 v1@42.21,49.496
VBat: C22.2 D7.2 D8.2 U6.L6 | length 68.5
  Component Side w0.305: D7.2@36.957,82.931 D8.2@38.354,82.931 38.379,82.931 38.552,82.758 38.552,82.733 38.938,82.347 38.938,80.011 38.76,79.832 v1(38.756,79.832) ; v1(39.116,60.706) 39.828,60.706 40.283,60.251 v1(44.958,60.251) ; U6.L6@52.975,49.149 52.984,49.149 v1(53.467,49.632) ; C22.2@63.488,50.153 63.993,50.659 63.993,50.735 v1(64.008,50.749)
  Signal Layer 2 w0.305: v1(44.958,60.251) 45.677,60.251 45.801,60.376 47.062,60.376 49.301,58.137 50.773,58.137 52.464,56.446 52.464,56.44 54.509,54.395 55.45,54.395 56.945,52.9 56.945,52.51 56.67,52.235 54.652,52.235 52.722,50.305 52.494,50.305 52.006,49.817 52.006,49.164 52.185,48.985 52.82,48.985 v1(53.467,49.632)
  Signal Layer 2 w0.381: v1(53.467,49.632) 54.102,48.997 55.016,48.997 55.349,48.664 v1(55.448,48.664)
  Signal Layer 1 w0.381: v1(55.448,48.664) 55.592,48.664 56.707,47.549 60.808,47.549 v1(64.008,50.749)
  Solder Side w0.305: v1(38.756,79.832) 38.756,73.894 39.203,73.447 39.203,60.793 v1(39.116,60.706)
VDDA: L1.1 R31.1 U6.H5 | length 33.9
  Component Side w0.305: v1(30.353,37.985) 30.353,38.722 R31.1@30.607,38.976 ; v1@43.351,51.232 43.351,51.86 L1.1@43.446,51.955 ; v1(51.52,51.693) U6.H5@51.975,52.149
  Signal Layer 2 w0.381: v1(30.353,37.985) 30.353,41.034 32.97,43.651 37.07,43.651 37.78,44.361 40.266,44.361 41.669,45.764 41.669,49.776 43.201,51.308 v1(43.317,51.308) 43.434,51.308 44.22,52.094 48.116,52.094 48.158,52.136 51.077,52.136 v1(51.52,51.693)
"WIFI IRQ": U6.A12 U11.13 | length 10.7
  Component Side w0.305: U6.A12@58.975,59.149 59.16,59.334 v1(59.792,59.334) ; U11.13@65.558,60.904 v1(66.827,60.904)
  Signal Layer 2 w0.381: v1(59.792,59.334) 60.7,60.243 63.444,60.243 63.742,59.945 63.742,59.695 64.052,59.385 65.309,59.385 v1(66.827,60.904)
"WIFI Reset": R27.1 U6.M8 U11.4 | length 51.4
  Component Side w0.305: U6.M8@54.975,48.149 54.975,47.843 55.524,47.294 v1(55.524,46.939) ; R27.1@63.488,66.548 v1(64.205,66.548) ; v1(77.978,56.846) U11.4@80.288,56.846
  Signal Layer 2 w0.381: v1(64.205,66.548) 68.276,66.548 v1(77.978,56.846)
  Signal Layer 1 w0.381: v1(63.252,52.172) 64.287,53.207 64.287,57.455 63.754,57.988 63.754,66.097 v1(64.205,66.548)
  Solder Side w0.305: v1(55.524,46.939) 55.524,47.295 54.978,47.841 54.978,50.377 54.877,50.478 54.877,50.868 56.107,52.098 57.386,52.098 58.273,51.211 58.662,51.211 59.432,51.981 59.896,51.981 60.15,52.235 61.659,52.235 61.723,52.172 v1(63.252,52.172)
XTAL32: U6.M7 X1.1 | length 4.2
  Component Side w0.254: X1.1@53.397,44.196 53.975,44.774 U6.M7@53.975,48.149
Yellow: D4.1 U6.A1 | length 86.9
  Component Side w0.305: v1(47.346,60.757) 47.346,59.778 U6.A1@47.975,59.149 ; D4.1@66.558,28.067 66.812,27.813 v1(67.666,27.813)
  Signal Layer 1 w0.381: v1(47.346,60.757) 47.346,61.798 v1(48.158,62.611) ; v1(67.666,27.813) 67.666,30.251 67.742,30.328 67.742,34.925 73.52,40.703 73.52,49.314 75.616,51.41 v1(75.616,67.97)
  Solder Side w0.305: v1(48.158,62.611) 48.158,67.945 54.712,74.498 69.088,74.498 v1(75.616,67.97)
pads on no net: JTAG/SWD.7 LP1. LP2. LP3. LP4. P3.2 P3.3 P3.6 SW20. SW21. U3.1 U6.A6 U6.A7 U6.A10 U6.B3 U6.B5 U6.B6 U6.B10 U6.C5 U6.C6 U6.C10 U6.D5 U6.D6 U6.E1 U6.F2 U6.F3 U6.F4 U6.F9 U6.F10 U6.F11 U6.F12 U6.G2 U6.G3 U6.H4 U6.J1 U6.J2 U6.J3 U6.J4 U6.J7 U6.J8 U6.J10 U6.J12 U6.K1 U6.K3 U6.K8 U6.K12 U6.L1 U6.L2 U6.L5 U6.L7 U6.L8 U6.L9 U6.M1 U6.M2 U6.M5 U6.M9 U7.8 U11.1 U11.2 U11.3 U11.5 U11.6 U11.7 U11.8 U11.21 U11.25 U11.26 U11.27 U15.1 U15.2 U15.3 U15.7 U16.5 U16.11 U16.12 U16.14 U16.15 U16.16 USB1.0 USB1.5

## Polygon pours and split planes (outlines as drawn)
GND on Component Side "GND_L01_P005" (solid, pour order 5): 25.4,25.4 25.4,42.964 28.702,42.964 ccw(c28.702,46.291) 28.702,49.619 25.4,49.619 25.4,83.833 28.702,83.833 ccw(c28.702,87.16) 28.702,90.487 25.4,90.487 25.4,108.052 82.017,108.052 82.017,90.487 78.715,90.487 ccw(c78.715,87.16) 78.715,83.833 82.017,83.833 82.017,49.619 78.715,49.619 ccw(c78.715,46.291) 78.715,42.964 82.017,42.964 82.017,25.4
GND on Solder Side "GND_L04_P006" (solid, pour order 6): 25.4,25.4 25.4,42.964 28.702,42.964 ccw(c28.702,46.291) 28.702,49.619 25.4,49.619 25.4,83.833 28.702,83.833 ccw(c28.702,87.16) 28.702,90.487 25.4,90.487 25.4,108.052 82.017,108.052 82.017,90.487 78.715,90.487 ccw(c78.715,87.16) 78.715,83.833 82.017,83.833 82.017,49.619 78.715,49.619 ccw(c78.715,46.291) 78.715,42.964 82.017,42.964 82.017,25.4

## Keep-outs
Keep-Out Layer:
  the board outline again, w0.254

## Other copper
Component Side:
  rectangle net GND: 63.366,32.037 65.095,37.4
  rectangle net 3V3: 37.709,34.395 39.337,34.621
  rectangle net 3V3: 74.676,77.47 81.788,83.566
  pour cut-out: 37.541,35.408 37.59,35.358 40.166,35.358 40.166,33.85 39.473,33.157 37.374,33.157 37.374,35.197 37.059,35.512
Signal Layer 2:
  rectangle net GND: 63.373,32.258 73.431,36.703
  rectangle net GND: 52.578,46.291 54.354,48.641
  rectangle net GND: 49.311,43.18 59.944,46.609
  rectangle net GND: 57.468,43.231 59.881,49.124
Solder Side:
  rectangle net GND: 63.175,32.661 65.263,36.887
  rectangle net 3V3: 77.648,57.658 81.801,79.223
  rectangle net GND: 68.961,53.848 77.089,65.786
  rectangle net 3V3: 70.866,77.47 81.801,90.297

## Silkscreen, mask and mechanical layers (free items; w line width, h text height)
Top Overlay:
  text "TX" at 47.902,70.31 h0.64
Bottom Overlay:
  text "SCL" at 32.258,104.699 h0.76 r90
  text "J1708-" at 51.308,104.699 h0.64 r90
  text "J1708+" at 54.127,104.699 h0.64 r90
  text "Gnd" at 27.431,104.623 h0.76 r90
  text "SWCAN" at 37.592,104.17 h0.64 r90
  text "CAN0L" at 45.847,104.17 h0.64 r90
  text "CAN0H" at 48.641,104.17 h0.64 r90
  text "CAN1L" at 40.284,104.064 h0.64 r90
  text "A7" at 42.972,102.477 h0.76 r90
  text "15" at 56.337,99.593 h0.76
  text "9" at 35.865,99.517 h0.76
  text "8" at 56.871,96.926 h0.76
  text "1" at 34.468,96.825 h0.76
  text "A6" at 36.117,95.834 h0.76 r90
  text "LIN" at 38.817,95.834 h0.76 r90
  text "CAN2H" at 41.655,95.834 h0.76 r90
  text "CAN2L" at 44.357,95.834 h0.76 r90
  text "CAN1H" at 47.104,95.834 h0.76 r90
  text "Gnd" at 50.011,95.834 h0.76 r90
  text "Gnd" at 52.781,95.834 h0.76 r90
  text "Vin" at 55.702,95.834 h0.76 r90
  text "NMFTA CAN Logger 3  / Revision 3e, August 2020 / J. Daily, Colo. State Univ. / Fits BUD HP-3651-B Enclosure" at 34.95,77.546 h1.02 r90
Mechanical 1:
  text "Dots are anodes / Bars are Cathodes" at 33.001,21.463 h1.02

## Dimensions
67.691,39.726 to 82.017,25.4 on Mechanical 1
25.4,25.4 to 82.017,25.4 on Mechanical 1
25.4,25.4 to 25.4,108.052 on Mechanical 1

## Text inside footprints (layer, text, board x,y; h text height)
C2: Top Overlay "+" at 51.029,77.47 h1.52 r180
C3: Top Overlay "+" at 50.927,88.265 h1.52 r180
C28: Top Overlay "+" at 50.927,66.675 h1.52 r180
J1: Top Overlay "1" at 34.925,98.298 h0.76; Top Overlay "8" at 54.991,98.298 h0.76; Top Overlay "15" at 53.213,101.219 h0.76; Top Overlay "9" at 37.465,101.219 h0.76
K1: Top Overlay "COIL" at 34.69,89.022 h0.76 r90; Top Overlay "NC1" at 38.59,86.622 h0.76 r90; Top Overlay "N01" at 46.14,86.622 h0.76 r90; Top Overlay "NO2" at 46.14,91.922 h0.76 r90; Top Overlay "NC2" at 38.54,91.922 h0.76 r90; Top Overlay "COM" at 42.29,89.322 h0.76 r90
U1: Top Overlay "GND" at 38.564,53.975 h1.02 r90; Top Overlay "Vout" at 40.259,50.673 h0.51; Top Overlay "TAB" at 30.734,53.594 h1.02 r90; Top Overlay "Vin" at 40.259,59.055 h0.51